# EAGLE board utility hat (EAGLE 6.3)
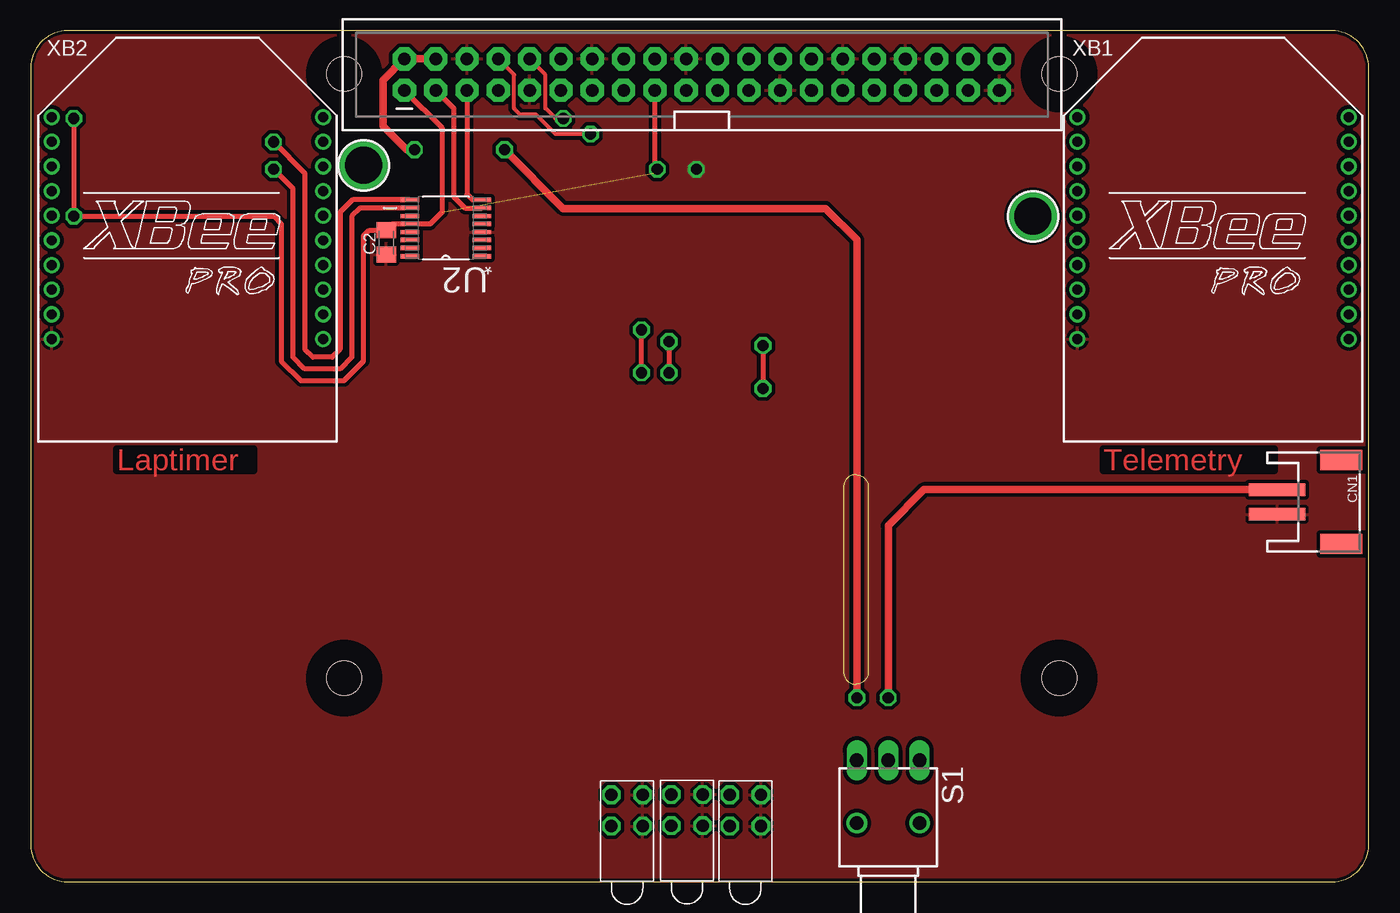
[diagram p0: board, top side]
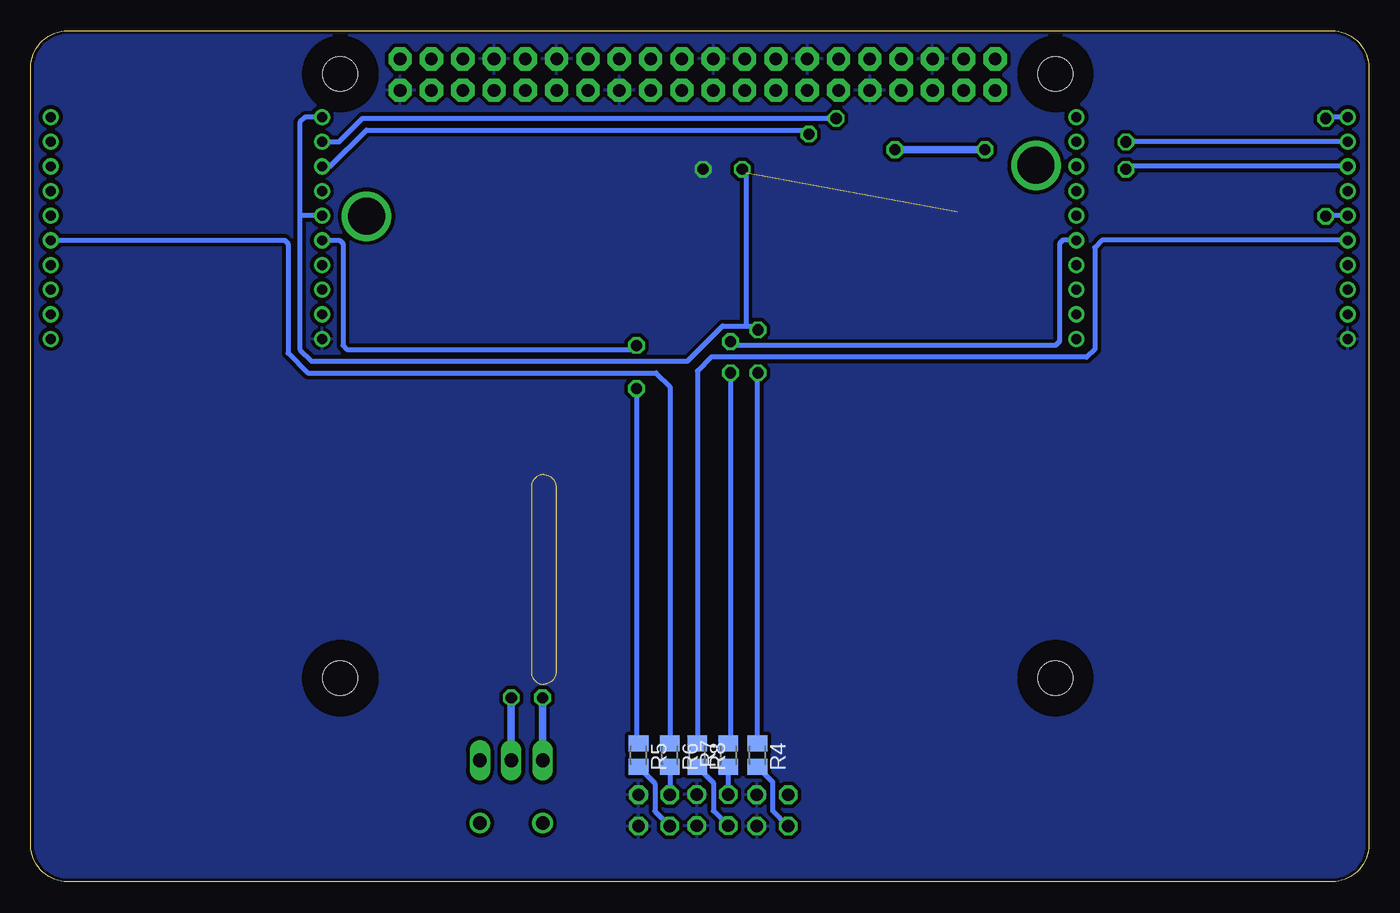
[diagram p1: board, bottom side, seen from below]

Size 108.5 x 69.02 mm. Coordinates in mm from the lower left corner, seen from the top.
Outline: 0,3 arc90 3,0 105.5,0 arc90 108.5,3 108.5,66.02 arc90 105.5,69.02 3,69.02 arc90 0,66.02 0,3
Copper layers (1*16): Top 0.035mm / dielectric 1.5mm / Bottom 0.035mm
Design rules "ITEADstudio_DRC *": minimum track width 6mil, minimum drill 12mil, track to track 12mil, track to pad 12mil, pad to pad 12mil, via to via 12mil, smd to smd 0mil, copper to edge 10mil, drill to drill 10mil, minimum pad ring 10mil, minimum via ring 6mil, stop-mask expansion 2mil, vias tented up to drill 100mil, thermal gap 10mil
Holes 2.8 mm at 25.41,16.52 25.41,65.52 83.41,65.52 83.41,16.52
tRestrict: area 23.9,64 to 27,67.1; area 81.9,64 to 85,67.1; area 81.9,15 to 85,18.1; area 23.9,15 to 27,18.1
bRestrict: area 23.9,15 to 27,18.1; area 23.9,64 to 27,67.1; area 81.9,15 to 85,18.1; area 81.9,64 to 85,67.1
Milling: 6 lines

## Footprints (pad centres in the part's own frame; a part is rotated, then mirrored left to right if it is on the bottom)
C0805K = smd 1.3 x 1.6: 1 -1,0; 2 1,0
JSTPH2 = smd 1 x 4.6: 1 -1,-3.7; 2 1,-3.7 | smd 1.6 x 3.4: NC1 -3.4,1.5; NC2 3.4,1.5
2X20-SHROUDED = drill 1.016 pad 1.88 octagon: 1 -1.27,24.13; 2 1.27,24.13; 3 -1.27,21.59; 4 1.27,21.59; 5 -1.27,19.05; 6 1.27,19.05; 7 -1.27,16.51; 8 1.27,16.51; 9 -1.27,13.97; 10 1.27,13.97; 11 -1.27,11.43; 12 1.27,11.43; 13 -1.27,8.89; 14 1.27,8.89; 15 -1.27,6.35; 16 1.27,6.35; 17 -1.27,3.81; 18 1.27,3.81; 19 -1.27,1.27; 20 1.27,1.27; 21 -1.27,-1.27; 22 1.27,-1.27; 23 -1.27,-3.81; 24 1.27,-3.81; 25 -1.27,-6.35; 26 1.27,-6.35; 27 -1.27,-8.89; 28 1.27,-8.89; 29 -1.27,-11.43; 30 1.27,-11.43; 31 -1.27,-13.97; 32 1.27,-13.97; 33 -1.27,-16.51; 34 1.27,-16.51; 35 -1.27,-19.05; 36 1.27,-19.05; 37 -1.27,-21.59; 38 1.27,-21.59; 39 -1.27,-24.13; 40 1.27,-24.13
M0805 = smd 1.3 x 1.6: 1 -0.95,0; 2 0.95,0
TL3XWO = drill 1.1 pad 1.422 long: 1 -2.54,-5.08; 2 0,-5.08; 3 2.54,-5.08 | drill 1.1 pad 1.676: M1 -2.54,0; M2 2.54,0
SOP65P640X110-16N = smd 1.473 x 0.356: 1 -2.921,2.286; 2 -2.921,1.626; 3 -2.921,0.965; 4 -2.921,0.33; 5 -2.921,-0.33; 6 -2.921,-0.965; 7 -2.921,-1.626; 8 -2.921,-2.286; 9 2.921,-2.286; 10 2.921,-1.626; 11 2.921,-0.965; 12 2.921,-0.33; 13 2.921,0.33; 14 2.921,0.965; 15 2.921,1.626; 16 2.921,2.286
BI-LEVEL-LED-INDICATOR = drill 1 octagon: ANODE1 1.27,1.27; ANODE2 1.27,-1.27; CATHODE1 -1.27,1.27; CATHODE2 -1.27,-1.27
MOUNTINGHOLE_3.0_PLATEDTHIN = drill 3 pad 3.6: P$1 0,0
XBEE-PRO = drill 0.8 pad 1.27: 1 -11,9; 2 -11,7; 3 -11,5; 4 -11,3; 5 -11,1; 6 -11,-1; 7 -11,-3; 8 -11,-5; 9 -11,-7; 10 -11,-9; 11 11,-9; 12 11,-7; 13 11,-5; 14 11,-3; 15 11,-1; 16 11,1; 17 11,3; 18 11,5; 19 11,7; 20 11,9

## Placement (x,y rotation side)
C2  100nF  [C0805K]  28.83,51.85 90 top
CN1  [JSTPH2]  104.78,30.8 270 top
JP1  RASPBERRYPI-B+-GPIO  [2X20-SHROUDED]  54.42,65.47 90 top
R4  1k  [M0805]  49.56,10.26 270 bottom
R5  3k9  [M0805]  59.21,10.26 270 bottom
R6  3k9  [M0805]  56.67,10.26 270 bottom
R7  3k9  [M0805]  51.94,10.26 90 bottom
R8  3k9  [M0805]  54.45,10.26 270 bottom
S1  TL36WO  [TL3XWO]  69.53,4.76 180 top
U2  SC18IM700IPW,112  [SOP65P640X110-16N]  33.66,53.02 180 top
U$1  BI-LEVEL-LED-INDICATOR  [BI-LEVEL-LED-INDICATOR]  57.94,5.78 180 top
U$2  BI-LEVEL-LED-INDICATOR  [BI-LEVEL-LED-INDICATOR]  53.21,5.81 180 top
U$3  BI-LEVEL-LED-INDICATOR  [BI-LEVEL-LED-INDICATOR]  48.36,5.78 180 top
U$4  MOUNTINGHOLE3.0THIN  [MOUNTINGHOLE_3.0_PLATEDTHIN]  81.28,53.98 0 top
U$5  MOUNTINGHOLE3.0THIN  [MOUNTINGHOLE_3.0_PLATEDTHIN]  26.99,58.1 0 top
XB1  XBEE-PRO  [XBEE-PRO]  95.89,53.02 0 top
XB2  XBEE-PRO  [XBEE-PRO]  12.7,53.02 0 top

## Library data of the parts
C2 = resistor; DIELECTRIC: X7R
CN1 U$4 U$5 = microbuilder
JP1 = SparkFun-Boards
R4-R8 = resistor; TOLERANCE: 5%
S1 = switch
U2 = NXP_By_element14_Batch_1; MPN: SC18IM700IPW,112; OC_FARNELL: -; OC_NEWARK: 70R9006; PACKAGE: TSSOP-16; SUPPLIER: NXP
U$1-U$3 = unicorn_v2
XB1 XB2 = maxstream; MPN: XBP24-AWI-001; OC_FARNELL: 1337916; OC_NEWARK: 42M2667

## Nets
+3V3: C2.2 JP1.1 JP1.17 R4.1 U2.12 XB1.1 XB1.5 XB2.1 XB2.5
+5V: JP1.2 JP1.4 S1.3
GND: C2.1 CN1.2 JP1.6 JP1.9 JP1.14 JP1.20 JP1.25 JP1.30 JP1.34 JP1.39 U2.4 U$1.CATHODE1 U$1.CATHODE2 U$2.CATHODE1 U$2.CATHODE2 U$3.CATHODE1 U$3.CATHODE2 XB1.10 XB2.10
N$1: U2.10 XB2.3
N$2: U2.9 XB2.2
N$4: R4.2 U$3.ANODE1
N$5: R6.1 XB1.15
N$6: R6.2 U$1.ANODE2
N$7: R5.1 XB1.6
N$8: R5.2 U$1.ANODE1
N$9: R7.1 U$2.ANODE2
N$10: R8.2 U$2.ANODE1
N$11: R7.2 XB2.15
N$12: R8.1 XB2.6
N$16: CN1.1 S1.2
RX: JP1.10 XB1.2
SCL: JP1.5 U2.8
SDA: JP1.3 U2.7
TX: JP1.8 XB1.3

## Tracks (layer width: path | path; a pad name or v marks a point on that pad's centre or on a via)
+3V3  (via drill 0.9)  (1 unrouted)
  Top 0.406: JP1.1 33.34,61.15 33.34,54.29 32.4,53.35 U2.12 29.33,53.35 C2.2 27.45,52.85 26.99,52.39 26.99,42.23 25.4,40.64 21.91,40.64 20.32,42.23 20.32,53.34 19.68,53.98 v3.49,53.98 v3.49,61.91 | v50.8,57.78 50.61,57.98 JP1.17 | v49.53,41.28 v49.53,44.77
  Bottom 0.406: XB1.1 86.25,62.02 86.68,61.6 86.68,54.02 | 86.68,54.02 86.68,43.18 85.73,42.23 55.24,42.23 52.39,45.09 50.48,45.09 | XB1.5 86.68,54.02 | XB2.1 3.38,62.02 arc-90 v3.49,61.91 | XB2.5 3.45,54.02 arc-90 v3.49,53.98 | v50.8,57.78 50.48,57.47 50.48,45.09 | R4.1 49.56,41.24 v49.53,41.28 | 50.48,45.09 49.85,45.09 v49.53,44.77
+5V  (via drill 0.9)
  Top 0.61: JP1.4 JP1.2 28.58,65.02 28.58,61.28 30.48,59.37 v31.11,59.37 | v66.99,14.92 66.99,52.07 64.45,54.61 43.18,54.61 v38.42,59.37
  Bottom 0.61: S1.3 v66.99,14.92 | v38.42,59.37 v31.11,59.37
GND  (via drill 0.9)
  other vias: 53.98,57.78
  pour Bottom: 0,3 arc90 3,0 105.5,0 arc90 108.5,3 108.5,66.02 arc90 105.5,69.02 3,69.02 arc90 0,66.02
  pour Top: 0,3 arc90 3,0 105.5,0 arc90 108.5,3 108.5,66.02 arc90 105.5,69.02 3,69.02 arc90 0,66.02
N$1  (via drill 0.9)
  Top 0.406: U2.10 26.71,54.65 26.04,53.98 26.04,42.54 25.08,41.59 22.23,41.59 21.27,42.54 21.27,56.2 v19.68,57.78
  Bottom 0.406: XB2.3 19.45,58.02 v19.68,57.78
N$2  (via drill 0.9)
  Top 0.406: U2.9 26.1,55.31 25.08,54.29 25.08,43.18 24.45,42.54 22.86,42.54 22.23,43.18 22.23,57.47 v19.68,60.01
  Bottom 0.406: XB2.2 1.72,60.01 v19.68,60.01
N$3  (via drill 0.6)
  other vias: 25.4,16.51
N$4
  Bottom 0.406: U$3.ANODE1 48.32,5.75 48.32,8.07 R4.2
N$5
  Bottom 0.406: XB1.15 87.9,52.02 87.63,51.75 87.63,42.86 86.04,41.28 57.78,41.28 56.67,40.16 R6.1
N$6
  Bottom 0.406: R6.2 U$1.ANODE2
N$7  (via drill 0.9)
  Top 0.406: v59.37,43.5 v59.37,40.01
  Bottom 0.406: XB1.6 83.45,52.02 83.19,51.75 83.19,43.5 82.87,43.18 59.69,43.18 v59.37,43.5 | v59.37,40.01 59.37,11.36 R5.1
N$8
  Bottom 0.406: R5.2 57.88,7.97 57.88,5.71 U$1.ANODE1
N$9
  Bottom 0.406: R7.1 U$2.ANODE2
N$10
  Bottom 0.406: R8.2 53.15,8 53.15,5.75 U$2.ANODE1
N$11  (via drill 0.9)
  Top 0.406: v51.75,43.81 v51.75,41.28
  Bottom 0.406: XB2.15 24.81,52.02 25.08,51.75 25.08,43.81 25.4,43.5 51.43,43.5 v51.75,43.81 | v51.75,41.28 51.75,11.4 R7.2
N$12
  Bottom 0.406: XB2.6 21.64,52.02 22.23,51.43 22.23,43.18 22.86,42.54 53.34,42.54 54.45,41.43 R8.1
N$13  (via drill 0.6)
  other vias: 83.5,16.51
N$14  (via drill 0.6)
  other vias: 25.4,65.41
N$15  (via drill 0.6)
  other vias: 83.5,65.41
N$16  (via drill 0.9)
  Top 0.61: CN1.1 72.44,31.8 69.53,28.89 v69.53,14.92
  Bottom 0.61: v69.53,14.92 S1.2
RX  (via drill 0.9)
  Top 0.305: v43.18,61.91 42.54,61.91 41.73,62.73 41.73,65.46 JP1.10
  Bottom 0.406: XB1.2 83.49,60.02 81.6,61.91 v43.18,61.91
SCL
  Top 0.406: JP1.5 35.37,55.75 35.81,55.31 U2.8
SDA
  Top 0.406: JP1.3 34.29,62.74 34.29,55.56 35.2,54.65 U2.7
TX  (via drill 0.9)
  Top 0.305: v45.4,60.64 42.54,60.64 40.96,62.23 39.69,62.23 39.2,62.71 39.2,65.44 JP1.8
  Bottom 0.406: XB1.3 84.22,58.02 81.28,60.96 45.72,60.96 v45.4,60.64

## Text on the board
Top: Laptimer | Telemetry